# Altium PCB RevC.PcbDoc (part 2 of 2)
Units mm, origin at the board's own origin, x right, y up, seen from the top; angles counter-clockwise.
Board outline 80 x 88.52 mm, 2 copper layers (Top Layer, Bottom Layer); 116 components, 77 nets, 532 pads, 209 vias.
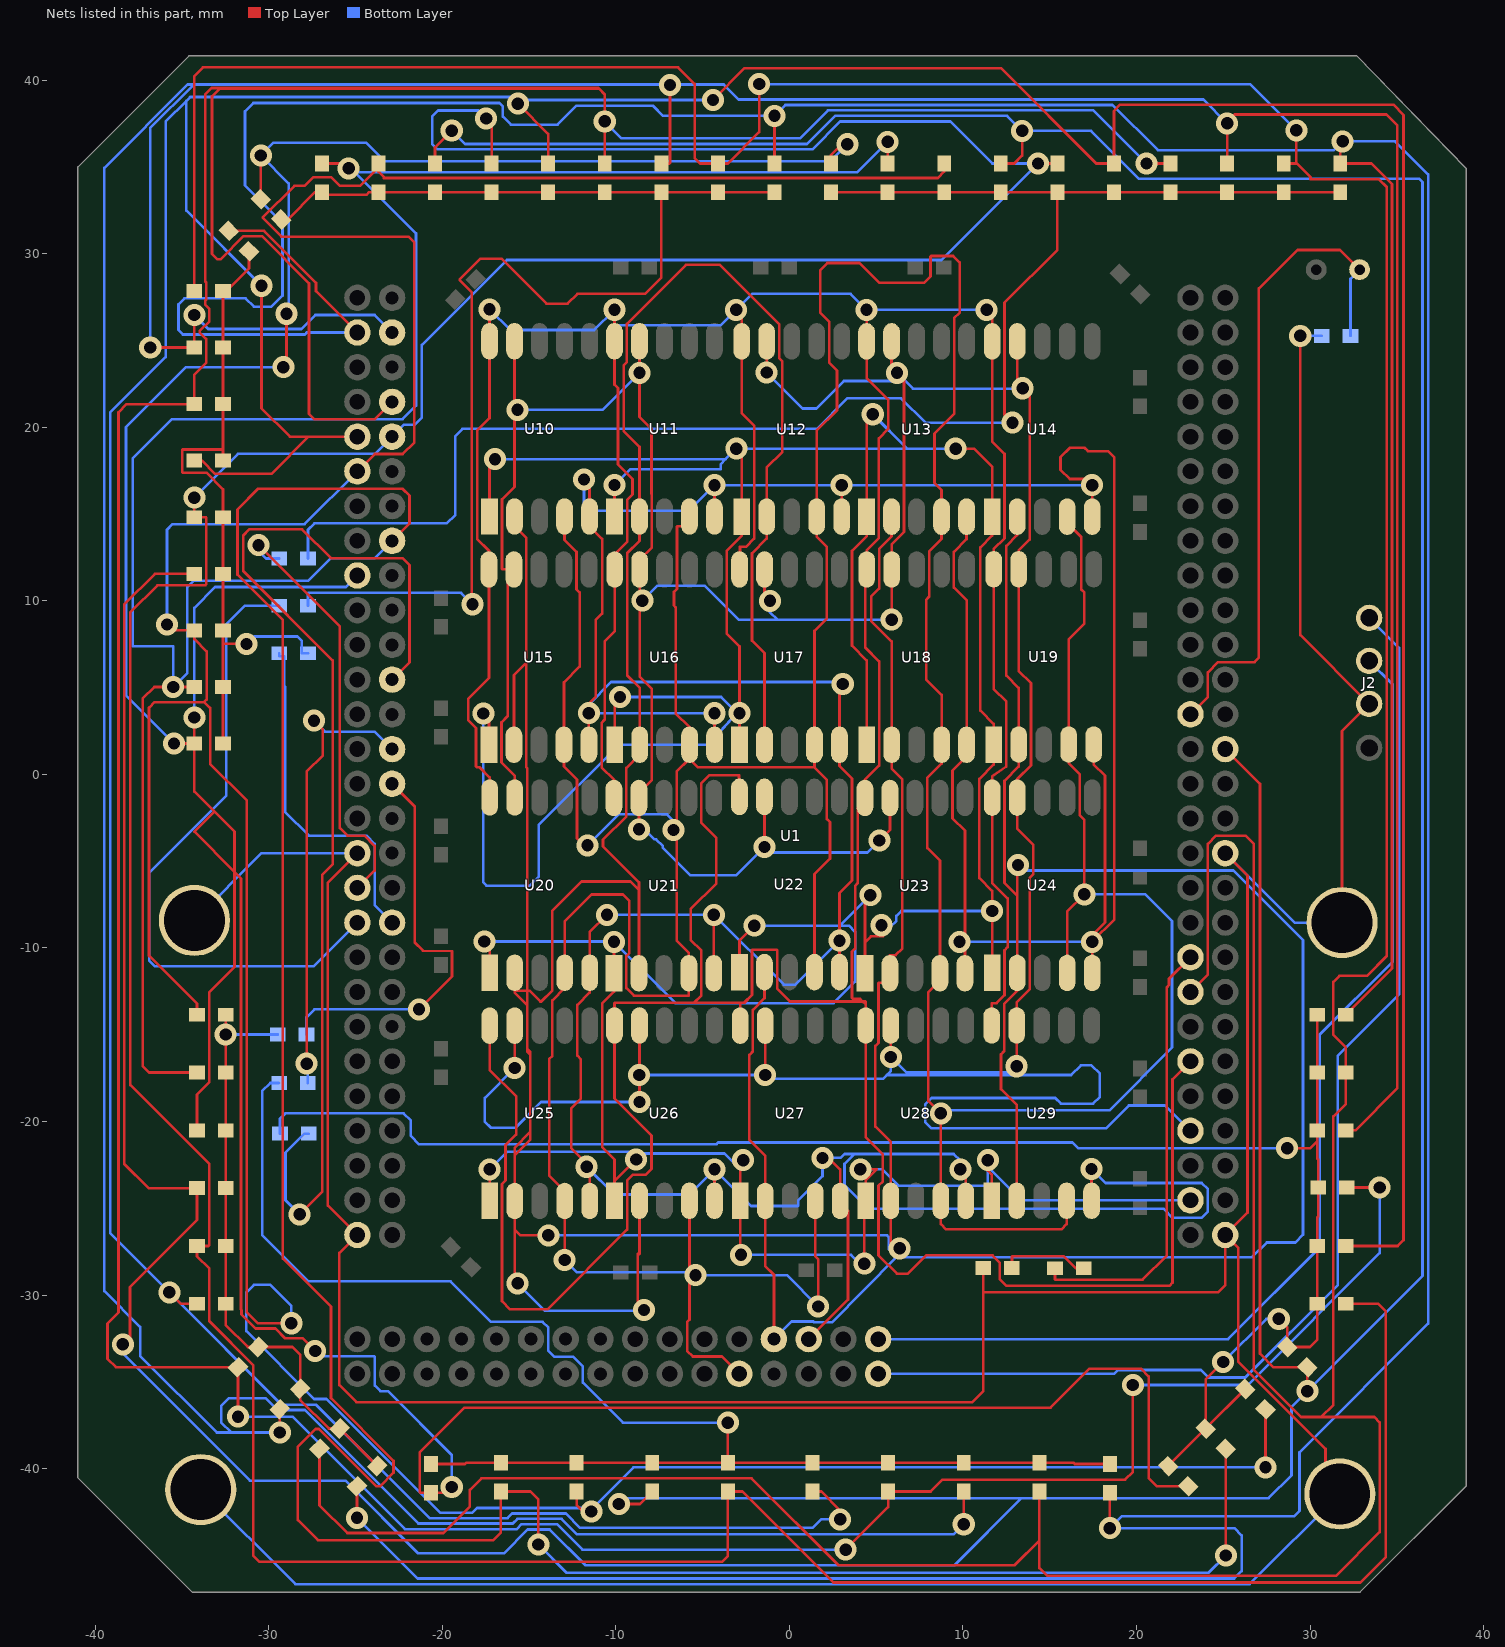
[diagram p2: the nets of this part, all layers, seen from the top]

## Via types
v1: diameter 1.27, hole 0.711, Top Layer to Bottom Layer, 209 vias

## Nets (pads, with @x,y where several pads share a name; then routed paths per layer and width w, separated by ;. In a path a pad name is that pad's centre, name@x,y a point inside that pad or via, vN(x,y) a via of type N, cw(c..) or ccw(c..) an arc to the next point about the centre after c; other vN are vias at no path point) (continued)
C_c/IO_VB7N2_197: U1.197 U10.4 U11.4 U12.4 U13.4 U14.4 U15.4 U16.4 U17.4 U18.4 U19.4 U20.4 U21.4 U22.4 U23.4 U24.4 U25.4 U26.4 U27.4 U28.4 U29.4 | length 307.5
  Top Layer w0.152: U10.4@-12.959,14.86 -12.959,13.518 -12.268,12.827 -12.268,10.668 -12.09,10.49 -12.09,6.211 -12.993,5.309 U15.4@-12.993,1.711 -12.993,0.457 -12.242,-0.294 -12.242,-3.683 -11.835,-4.089 v1(-11.633,-4.089) ; v1(-12.952,-27.98) U25.4@-12.952,-24.578 -12.952,-24.003 -13.843,-23.112 -13.843,-16.408 -13.665,-16.231 -13.665,-13.017 -12.952,-12.303 U20.4@-12.952,-11.43 -12.952,-8.482 -11.392,-6.921 -9.588,-6.921 -9.22,-7.29 -9.22,-10.287 -9.398,-10.465 -9.398,-12.306 -8.954,-12.751 -5.816,-12.751 -5.791,-12.725 U21.4@-5.791,-11.456 -5.791,-10.287 -6.502,-9.576 v1@-6.502,-3.023 ; v1(-6.68,-3.2) v1@-6.502,-3.023 ; U26.4@-5.759,-24.564 v1@-5.759,-28.506 ; U11.4@-5.759,14.86 -5.759,14.3 -6.452,14.3 -6.477,14.275 -6.477,10.693 -6.655,10.516 -6.655,9.728 -6.553,9.627 -6.553,3.517 -5.754,2.718 U16.4@-5.754,1.711 U16.4@-5.754,0.903 ; v1(-5.41,-28.854) v1@-5.759,-28.506 ; U1.197@-2.892,-34.538 -3.892,-33.538 -5.565,-33.538 -5.893,-33.21 -5.893,-31.547 -5.759,-31.413 v1@-5.759,-28.506 ; U22.4@1.441,-11.392 1.441,-5.747 2.337,-4.851 2.337,-2.743 2.159,-2.565 2.159,-0.318 1.444,0.398 1.444,0.406 ; U27.4@1.483,-24.578 1.483,-27.762 1.651,-27.93 v1(1.651,-30.658) ; U29.4@15.969,-24.564 15.969,-25.908 15.664,-26.213 9.029,-26.213 8.724,-25.908 U28.4@8.724,-24.57 v1(8.724,-19.533) 8.013,-18.821 8.001,-18.821 8.001,-12.548 8.673,-11.876 U23.4@8.673,-11.456 8.673,-4.965 7.95,-4.242 7.95,-0.191 8.767,0.626 U18.4@8.767,1.711 8.767,4.572 7.874,5.465 7.874,10.058 8.052,10.236 8.052,12.85 8.765,13.564 U13.4@8.765,14.852 8.765,16.381 8.357,16.789 8.357,19.638 9.495,20.777 9.495,26.284 9.804,26.594 9.804,29.502 9.436,29.87 8.179,29.87 8.128,29.82 8.128,28.702 7.747,28.321 5.182,28.321 4.039,29.464 2.184,29.464 1.778,29.058 1.778,26.594 2.286,26.086 2.286,23.724 2.743,23.266 2.743,20.98 1.569,19.806 U12.4@1.569,14.852 1.569,13.696 2.159,13.106 2.159,8.992 1.444,8.277 U17.4@1.444,1.711 1.444,0.406 ; U24.4@16.004,-11.437 16.004,-7.897 v1(16.993,-6.909) 16.993,-2.616 16.734,-2.357 16.734,0 16.09,0.644 U19.4@16.09,1.719 16.09,7.784 16.993,8.687 16.993,10.49 16.815,10.668 16.815,13.691 16.004,14.501 U14.4@16.004,14.852 ; v1@-6.502,-3.023 -6.502,0.154 U16.4@-5.754,0.903 ; U16.4@-5.754,0.903 -5.258,0.406 1.444,0.406
  Bottom Layer w0.152: v1(-12.952,-27.98) -12.255,-28.677 -5.588,-28.677 v1(-5.41,-28.854) -0.152,-28.854 v1(1.651,-30.658) ; v1(-11.633,-4.089) -9.847,-2.303 -7.048,-2.303 -6.68,-2.671 v1(-6.68,-3.2) ; v1(8.724,-19.533) 8.902,-19.355 18.43,-19.355 22.047,-15.738 22.047,-8.445 20.511,-6.909 v1(16.993,-6.909)
C_d/IO_VB7N2_196: U1.196 U10.2 U11.2 U12.2 U13.2 U14.2 U15.2 U16.2 U17.2 U18.2 U19.2 U20.2 U21.2 U22.2 U23.2 U24.2 U25.2 U26.2 U27.2 U28.2 U29.2 | length 360.5
  Top Layer w0.152: U15.2@-15.873,1.711 -15.873,5.729 -15.163,6.439 ; U10.2@-15.839,14.86 -15.839,14.3 -15.163,13.624 -15.163,6.439 ; U20.2@-15.832,-11.43 U20.2@-15.832,-12.471 ; v1(-15.659,-29.324) -15.832,-29.151 -15.832,-26.226 ; v1(-13.894,-26.561) -15.497,-26.561 -15.832,-26.226 ; U21.2@-8.671,-11.456 -8.671,-6.655 ; U26.2@-8.639,-24.564 -8.639,-27.638 -8.738,-27.638 -8.738,-30.505 v1(-8.382,-30.861) ; U22.2@-1.439,-11.392 -1.439,-12.897 -2.108,-13.566 -2.108,-15.951 -2.311,-16.154 -2.311,-21.057 -1.397,-21.971 U27.2@-1.397,-24.578 -1.397,-28.324 -0.892,-28.829 U1.196@-0.892,-32.538 ; U17.2@-1.436,1.711 -1.436,6.985 -2.159,7.708 -2.159,12.74 -1.311,13.588 U12.2@-1.311,14.852 -1.311,17.678 -0.406,18.583 -0.406,23.8 -0.584,23.978 -0.584,25.933 -4.013,29.362 -5.969,29.362 -9.369,25.963 -9.369,23.749 -9.55,23.567 -9.55,19.787 -8.639,18.875 U11.2@-8.639,14.86 -8.639,13.462 -9.344,12.757 -9.344,5.712 -8.634,5.002 U16.2@-8.634,1.711 -8.634,1.143 -9.398,0.379 -9.398,-2.413 -10.744,-3.759 -10.744,-4.15 -8.671,-6.223 -8.671,-6.655 ; v1@5.844,-27.178 U28.2@5.844,-24.57 5.844,-21.184 4.953,-20.293 4.953,-15.646 5.131,-15.469 5.131,-12.04 5.156,-12.014 5.793,-12.014 U23.2@5.793,-11.456 5.793,-10.414 6.122,-10.414 6.503,-10.033 6.503,-0.286 5.887,0.33 U18.2@5.887,1.711 5.887,7.656 4.704,8.839 4.704,10.241 5.167,10.704 5.167,12.997 5.885,13.715 U13.2@5.885,14.852 ; U29.2@13.089,-24.564 13.089,-19.033 12.192,-18.136 12.192,-16.129 12.37,-15.951 12.37,-13.226 13.124,-12.471 U24.2@13.124,-11.437 13.124,-6.988 ; U14.2@13.124,14.852 13.124,13.792 12.497,13.165 12.497,5.692 13.21,4.978 U19.2@13.21,1.719 13.21,0.445 12.395,-0.37 12.395,-6.259 13.124,-6.988 ; v1(13.17,-5.22) 13.124,-5.266 13.124,-6.988 ; -15.832,-26.226 U25.2@-15.832,-24.578 -15.832,-21.953 ; -15.832,-21.953 -14.935,-21.057 -14.935,-20.617 ; -15.832,-21.953 -15.832,-21.514 -14.935,-20.617 ; U20.2@-15.832,-12.471 -15.113,-12.471 ; U20.2@-15.832,-12.471 -15.832,-12.573 -15.113,-13.292 ; -15.163,6.439 -15.163,0.405 -15.113,0.356 -15.113,-12.471 ; -15.113,-15.799 -14.935,-15.977 -14.935,-16.129 ; -15.113,-15.799 -15.113,-13.292 ; -15.113,-15.799 -15.113,-15.951 -14.935,-16.129 ; -15.113,-13.292 -15.113,-12.471 ; -15.113,-12.471 -14.961,-12.471 -14.351,-13.081 -14.3,-13.081 -13.665,-12.446 -13.665,-7.849 -11.983,-6.167 -9.159,-6.167 -8.671,-6.655 ; -14.935,-20.617 -14.935,-16.129
  Bottom Layer w0.152: v1(-15.659,-29.324) -14.072,-30.912 -8.433,-30.912 v1(-8.382,-30.861) ; v1(-13.894,-26.561) 5.633,-26.561 5.715,-26.643 5.715,-27.356 v1@6.172,-27.813 ; U1.196@-0.892,-32.538 0.125,-31.521 1.372,-31.521 1.422,-31.572 2.451,-31.572 v1@6.172,-27.813 ; v1(13.17,-5.22) 13.487,-5.537 25.578,-5.537 29.591,-9.55 29.591,-26.524 29.146,-26.968 27.506,-26.968 26.661,-27.813 v1@6.172,-27.813
  other v1: 6.35,-27.305
C_DP/IO_VB7N2_194: U1.194 U10.5 U11.5 U12.5 U13.5 U14.5 U15.5 U16.5 U17.5 U18.5 U19.5 U20.5 U21.5 U22.5 U23.5 U24.5 U25.5 U26.5 U27.5 U28.5 U29.5 | length 294.2
  Top Layer w0.152: v1(-11.836,16.993) -11.519,16.675 U10.5@-11.519,14.86 -11.519,14.3 -10.795,13.576 -10.795,9.271 -11.151,8.915 -11.151,4.496 -11.553,4.093 v1@-11.553,3.527 ; v1(-11.557,3.531) v1@-11.553,3.527 ; U15.5@-11.553,1.711 v1@-11.553,3.527 ; v1@-11.549,3.523 v1@-11.553,3.527 ; U25.5@-11.512,-24.578 -11.512,-22.6 -12.573,-21.539 -12.573,-19.237 -12.014,-18.679 -12.014,-16.413 -12.222,-16.205 -12.222,-13.283 -11.512,-12.573 U20.5@-11.512,-11.43 -11.512,-9.086 v1(-10.516,-8.09) ; U21.5@-4.351,-11.456 v1(-4.351,-8.09) ; U26.5@-4.319,-24.564 v1(-4.319,-22.752) ; U11.5@-4.319,14.86 v1(-4.319,16.662) v1@-4.319,16.672 ; U16.5@-4.314,1.711 v1(-4.314,3.523) ; U1.194@1.108,-32.538 3.378,-30.268 3.378,-25.146 2.923,-25.146 U27.5@2.923,-24.578 2.923,-22.766 2.255,-22.098 v1(1.905,-22.098) ; U22.5@2.881,-11.392 v1(2.881,-9.58) 2.881,-6.831 3.607,-6.105 3.607,-0.24 2.884,0.483 U17.5@2.884,1.711 2.884,5.018 v1(3.073,5.207) ; U12.5@3.009,14.852 v1(3.009,16.662) ; v1@9.754,-22.758 v1@10.164,-23.169 ; v1(9.796,-9.644) v1@10.113,-9.962 ; v1(9.847,-22.758) 10.138,-22.758 10.164,-22.784 v1@10.164,-23.169 ; U23.5@10.113,-11.456 v1@10.113,-9.962 ; U28.5@10.164,-24.57 v1@10.164,-23.169 ; U13.5@10.205,14.852 10.205,13.555 9.477,12.827 9.477,10.767 10.207,10.037 U18.5@10.207,1.711 10.207,1.038 9.398,0.229 9.398,-2.527 10.113,-3.242 v1@10.113,-9.962 ; U29.5@17.409,-24.564 v1(17.409,-22.733) ; U24.5@17.444,-11.437 v1(17.444,-9.644) v1@17.444,-9.627 ; U14.5@17.444,14.852 v1(17.444,16.662) 17.444,16.681 17.107,17.018 16.153,17.018 15.621,17.55 15.621,18.288 16.154,18.821 17.011,18.821 17.205,18.628 18.351,18.628 18.72,18.259 18.72,-8.351 v1@17.444,-9.627 ; U19.5@17.53,1.719 17.53,0.58 18.186,-0.076 18.186,-8.534 17.444,-9.277 v1@17.444,-9.627
  Bottom Layer w0.152: v1(-11.836,16.993) -11.836,15.545 -11.493,15.202 -5.789,15.202 -4.324,16.667 v1@-4.319,16.672 ; v1(-11.684,-22.606) -10.084,-24.206 -5.766,-24.206 -4.319,-22.759 v1(-4.319,-22.752) -2.204,-24.867 0.479,-24.867 0.505,-24.841 0.505,-24.549 1.905,-23.149 v1(1.905,-22.098) 2.956,-22.098 3.185,-21.869 3.746,-21.869 ; v1(-11.557,3.531) -11.557,4.04 -10.274,5.323 2.957,5.323 v1(3.073,5.207) ; v1@-11.549,3.523 v1(-4.314,3.523) ; v1(-10.516,-8.09) v1(-4.351,-8.09) -0.325,-12.116 0.345,-12.116 v1(2.881,-9.58) ; v1(-4.319,16.662) v1(3.009,16.662) v1(17.444,16.662) ; v1(9.796,-9.644) v1(17.444,-9.644) ; v1(9.847,-22.758) 9.847,-22.254 9.461,-21.869 3.746,-21.869 ; v1(17.409,-22.733) 18.222,-23.546 23.749,-23.546 24.105,-23.901 24.105,-25.191 23.749,-25.546 22.073,-25.546 21.545,-25.019 4.534,-25.019 3.175,-23.66 3.175,-22.441 3.746,-21.869
C_e/IO_VB7N0_183: U1.183 U10.1 U11.1 U12.1 U13.1 U14.1 U15.1 U16.1 U17.1 U18.1 U19.1 U20.1 U21.1 U22.1 U23.1 U24.1 U25.1 U26.1 U27.1 U28.1 U29.1 | length 285
  Top Layer w0.152: v1(-17.64,3.505) -17.313,3.178 U15.1@-17.313,1.711 ; v1(-17.577,-9.627) -17.272,-9.931 U20.1@-17.272,-11.43 ; U10.1@-17.279,14.86 -17.279,17.849 v1(-16.967,18.161) ; U25.1@-17.272,-24.578 v1(-17.272,-22.758) ; v1(-10.111,-9.644) U21.1@-10.111,-11.456 -10.111,-12.522 -10.795,-13.206 -10.795,-21.471 -10.079,-22.187 -10.079,-23.431 ; U26.1@-10.079,-24.564 -10.079,-23.431 ; U11.1@-10.079,14.86 v1(-10.079,16.672) ; U16.1@-10.074,1.711 -10.074,4.15 v1(-9.766,4.458) ; v1(-8.834,-22.187) -10.079,-23.431 ; v1(-3.061,18.771) -2.751,18.461 U12.1@-2.751,14.852 -2.751,13.741 -3.604,12.889 -3.604,8.103 -2.876,7.375 v1(-2.876,3.531) U17.1@-2.876,1.711 ; U22.1@-2.879,-11.392 -2.879,-9.572 v1(-2.019,-8.712) ; v1@-2.837,-27.389 U27.1@-2.837,-24.578 -2.837,-22.766 v1@-2.833,-22.762 ; v1(4.087,-22.758) 5.014,-22.758 4.404,-23.368 U28.1@4.404,-24.57 4.318,-24.656 v1(4.318,-28.194) ; U23.1@4.353,-11.456 4.353,-9.673 ; U18.1@4.447,1.711 4.447,6.577 3.607,7.417 3.607,12.878 4.445,13.716 U13.1@4.445,14.852 4.445,20.396 v1(4.801,20.752) ; v1(4.661,-6.96) 4.353,-7.267 4.353,-9.673 ; v1(5.306,-8.692) 5.44,-8.826 5.44,-9.264 5.377,-9.327 4.699,-9.327 4.353,-9.673 ; v1(9.576,18.771) 10.643,18.771 11.684,17.729 U14.1@11.684,14.852 11.684,13.767 10.998,13.081 10.998,3.683 11.77,2.911 U19.1@11.77,1.719 11.77,0.559 10.947,-0.264 10.947,-5.976 11.684,-6.712 v1(11.684,-7.87) U24.1@11.684,-11.437 ; v1(11.43,-22.225) 11.43,-22.832 11.649,-23.05 U29.1@11.649,-24.564
  Bottom Layer w0.152: v1(-17.64,3.505) -17.64,-6.223 -17.456,-6.407 -14.954,-6.407 -14.453,-5.905 -14.453,-2.921 -9.83,1.702 -4.705,1.702 -3.01,3.531 -3.937,4.458 v1(-9.766,4.458) ; v1(-17.577,-9.627) -10.128,-9.627 v1(-10.111,-9.644) -6.572,-13.183 2.54,-13.183 3.785,-11.938 3.785,-9.068 3.429,-8.712 2.908,-8.712 ; v1(-17.272,-22.758) -16.254,-21.741 -9.28,-21.741 v1(-8.834,-22.187) -8.834,-21.844 -3.751,-21.844 v1@-2.833,-22.762 ; v1(-16.967,18.161) -3.67,18.161 ; v1(-10.079,16.672) -9.174,17.577 -3.962,17.577 -3.962,17.869 -3.67,18.161 ; v1(-2.794,-27.686) 3.556,-27.686 4.064,-28.194 v1(4.318,-28.194) ; v1(-2.019,-8.712) 2.908,-8.712 ; v1(4.087,-22.758) 5.357,-22.758 6.297,-23.698 11.281,-23.698 11.43,-23.549 v1(11.43,-22.225) ; v1(4.661,-6.96) 2.908,-8.712 ; v1(4.801,20.752) 6.782,18.771 ; v1@5.829,-8.772 6.155,-8.446 6.155,-8.159 6.444,-7.87 v1(11.684,-7.87) ; v1(9.576,18.771) 6.782,18.771 ; v1@11.451,-22.614 13.375,-24.538 U1.183@23.108,-24.538 ; -3.67,18.161 v1(-3.061,18.771) 6.782,18.771
  other v1: -2.667,-22.225
C_f/IO_VB7N0_176: U1.176 U10.9 U11.9 U12.9 U13.9 U14.9 U15.9 U16.9 U17.9 U18.9 U19.9 U20.9 U21.9 U22.9 U23.9 U24.9 U25.9 U26.9 U27.9 U28.9 U29.9 | length 276.5
  Top Layer w0.152: U15.9@-15.873,11.811 U15.9@-16.231,11.811 ; U10.9@-15.839,24.96 v1@-15.839,21.173 ; v1(-15.832,-16.916) U25.9@-15.832,-14.478 ; U20.9@-15.832,-1.33 -15.832,-0.068 -16.586,0.686 -16.586,2.997 -16.231,3.353 U15.9@-16.231,11.811 ; v1(-15.672,21.006) v1@-15.839,21.173 ; v1(-8.671,-3.168) U21.9@-8.671,-1.356 -8.671,-1.077 -7.924,-0.33 -7.924,4.919 -8.634,5.629 v1@-8.634,10.171 ; v1(-8.661,-17.323) v1@-8.639,-17.3 ; v1(-8.639,-18.872) v1@-8.639,-17.3 ; U26.9@-8.639,-14.464 v1@-8.639,-17.3 ; U11.9@-8.639,24.96 v1(-8.639,23.139) -8.639,20.602 -7.95,19.914 -7.95,16.154 -7.925,16.129 -7.925,13.079 -8.634,12.37 U16.9@-8.634,11.811 v1@-8.634,10.171 ; v1(-8.471,10.008) v1@-8.634,10.171 ; v1(-1.439,-4.182) U22.9@-1.439,-1.292 ; U17.9@-1.436,11.811 -1.436,10.316 v1(-1.119,9.999) ; v1(-1.397,-17.323) U27.9@-1.397,-14.478 ; v1(-1.311,23.155) U12.9@-1.311,24.952 ; v1(5.182,-3.81) 5.793,-3.199 U23.9@5.793,-1.356 ; v1(5.844,-16.282) U28.9@5.844,-14.47 ; U13.9@5.885,24.952 5.885,23.698 ; v1(5.887,8.915) U18.9@5.887,11.811 5.887,13.259 6.604,13.976 6.604,22.979 5.885,23.698 ; v1(6.202,23.14) 5.885,23.457 5.885,23.698 ; v1(13.089,-16.815) U29.9@13.089,-14.464 13.089,-13.139 13.843,-12.385 13.843,-5.96 14.046,-5.756 14.046,-4.048 13.124,-3.126 U24.9@13.124,-1.337 13.124,-0.279 13.92,0.517 13.92,5.257 13.21,5.967 U19.9@13.21,11.819 13.21,12.894 13.843,13.527 13.843,21.849 v1(13.441,22.25) 13.124,22.568 U14.9@13.124,24.952 ; U15.9@-16.231,11.811 -16.535,11.811 -16.561,11.836 -16.561,15.85 -15.839,16.571 v1@-15.839,21.173
  Bottom Layer w0.152: v1(-15.832,-16.916) -17.551,-18.636 -17.551,-20.017 -17.209,-20.36 -15.797,-20.36 -14.31,-18.872 v1(-8.639,-18.872) ; v1(-15.672,21.006) -10.773,21.006 v1(-8.639,23.139) ; v1(-8.671,-3.168) -8.354,-3.168 -7.777,-3.745 -7.683,-3.745 -7.293,-4.135 -7.293,-4.229 -5.703,-5.818 -3.075,-5.818 v1(-1.439,-4.182) -1.439,-4.496 4.496,-4.496 v1(5.182,-3.81) ; v1(-8.661,-17.323) v1(-1.397,-17.323) -1.194,-17.526 5.412,-17.526 5.615,-17.323 ; v1(-8.471,10.008) -7.607,10.871 -4.884,10.871 -2.928,8.915 -0.699,8.915 ; v1(-1.311,23.155) 0.762,21.082 1.551,21.082 3.139,22.669 6.202,22.669 v1(6.202,23.14) 7.117,22.225 13.416,22.225 v1(13.441,22.25) ; v1(-1.119,9.999) -1.119,9.335 -0.699,8.915 ; v1(5.887,8.915) -0.699,8.915 ; v1(13.089,-16.815) 12.733,-17.17 6.732,-17.17 v1(5.844,-16.282) 5.844,-17.094 5.615,-17.323 ; U1.176@23.108,-20.538 21.643,-19.074 19.56,-19.074 18.236,-20.398 8.191,-20.398 7.823,-20.03 7.823,-19.012 8.191,-18.644 15.316,-18.644 15.646,-18.974 17.488,-18.974 17.882,-18.58 17.882,-17.247 17.399,-16.764 16.789,-16.764 16.231,-17.323 5.615,-17.323
C_g/IO_VB6N1_171: U1.171 U10.10 U11.10 U12.10 U13.10 U14.10 U15.10 U16.10 U17.10 U18.10 U19.10 U20.10 U21.10 U22.10 U23.10 U24.10 U25.10 U26.10 U27.10 U28.10 U29.10 | length 325.3
  Top Layer w0.152: v1(-17.279,26.797) U10.10@-17.279,24.96 -17.279,20.523 -17.989,19.813 -17.989,13.564 -17.313,12.887 U15.10@-17.313,11.811 -17.313,5.561 -18.506,4.369 -18.506,3.113 -18.059,2.667 -18.059,0.457 -18.009,0.406 -17.843,0.406 -17.272,-0.165 U20.10@-17.272,-1.33 ; U25.10@-17.272,-14.478 -17.272,-17.018 -15.748,-18.542 -15.748,-20.752 -16.358,-21.361 -16.358,-23.393 -16.561,-23.597 -16.561,-30.353 -16.089,-30.825 -13.948,-30.825 -9.349,-26.226 -9.349,-23.393 -9.019,-23.063 -8.274,-23.063 -7.95,-22.739 -7.95,-20.803 -10.079,-18.674 U26.10@-10.079,-14.464 -10.079,-13.183 ; U21.10@-10.111,-1.356 -10.111,-0.303 -10.82,0.406 -10.82,2.972 -10.643,3.15 -10.643,7.671 -10.074,8.239 U16.10@-10.074,11.811 -10.074,12.673 -9.349,13.398 -9.349,15.822 -9.042,16.129 -9.042,17.018 -9.881,17.856 -9.881,22.255 -10.079,22.454 U11.10@-10.079,24.96 v1(-10.079,26.772) ; v1(-3.069,26.764) -2.751,26.446 U12.10@-2.751,24.952 -2.751,20.81 -2.032,20.091 -2.032,13.589 -2.508,13.113 -2.845,13.113 U17.10@-2.876,11.811 ; U22.10@-2.879,-1.292 -2.904,-0.051 -4.623,-0.051 -5.08,-0.508 -5.08,-2.794 -4.215,-3.659 -4.215,-6.272 -5.69,-7.747 -5.69,-9.55 -5.08,-10.16 -5.08,-12.751 -5.486,-13.157 ; U27.10@-2.837,-14.478 -2.837,-13.183 -2.862,-13.157 ; v1@4.445,26.772 v1(4.445,26.764) U13.10@4.445,24.952 4.445,22.847 5.69,21.603 5.69,19.901 5.155,19.367 5.155,13.614 4.447,12.906 U18.10@4.447,11.811 4.447,11.252 4.369,11.174 4.369,7.315 5.167,6.517 5.167,0.509 4.353,-0.305 U23.10@4.353,-1.356 4.353,-1.93 3.962,-1.93 3.937,-1.956 3.937,-6.271 3.785,-6.423 3.785,-10.033 3.607,-10.211 3.607,-12.878 3.658,-12.929 4.064,-12.929 4.216,-13.081 ; v1(11.367,26.772) 11.684,26.454 U14.10@11.684,24.952 11.684,19.177 12.395,18.466 12.395,13.605 11.77,12.979 U19.10@11.77,11.819 11.77,4.928 12.497,4.201 12.497,0.457 11.684,-0.102 U24.10@11.684,-1.337 11.684,-6.25 12.573,-7.139 12.573,-9.957 12.395,-10.135 12.395,-12.718 11.931,-13.183 11.674,-13.183 11.649,-13.208 U29.10@11.649,-14.464 ; U1.171@23.108,-16.538 22.073,-17.574 22.073,-29.286 21.895,-29.464 12.497,-29.464 12.116,-29.083 12.116,-28.13 11.697,-27.711 7.874,-27.711 6.82,-28.765 6.185,-28.765 5.131,-27.711 5.131,-23.698 5.385,-23.444 5.385,-21.895 4.404,-20.914 U28.10@4.404,-14.47 4.404,-13.269 ; -10.079,-13.183 -10.054,-13.157 -5.486,-13.157 ; -10.079,-13.183 -5.486,-13.157 ; -5.486,-13.157 -2.862,-13.157 ; -2.862,-13.157 -2.603,-13.157 -2.159,-12.713 -2.159,-10.135 -2.134,-10.109 -0.737,-10.109 -0.711,-10.135 -0.711,-12.344 0.025,-13.081 4.216,-13.081 ; 4.216,-13.081 4.379,-13.081 4.404,-13.106 4.404,-13.269 ; 4.216,-13.081 4.404,-13.269
  Bottom Layer w0.152: v1(-17.279,26.797) -16.085,25.603 -11.248,25.603 v1(-10.079,26.772) -10.079,25.883 -3.95,25.883 v1(-3.069,26.764) -2.147,27.686 3.531,27.686 v1@4.445,26.772 ; v1(4.445,26.764) 4.453,26.772 v1(11.367,26.772)
D0: D10.1 D11.1 D12.1 D13.1 D14.1 D15.1 D16.1 D17.1 D18.1 D19.1 R30.2 | length 39.8
  Top Layer w0.152: D10.1@-32.639,1.778 D11.1@-32.639,5.038 -32.639,7.544 ; D15.1@-32.639,18.078 -32.639,18.694 ; D18.1@-32.639,27.858 D18.1@-32.639,27.664 ; v1(-31.28,7.518) -32.614,7.518 -32.639,7.544 ; D19.1@-31.139,30.149 -31.139,29.164 D18.1@-32.639,27.664 ; -32.639,7.544 D12.1@-32.639,8.298 D13.1@-32.639,11.558 D14.1@-32.639,14.818 -32.639,16.425 -33.596,17.383 -34.95,17.383 -34.976,17.408 -34.976,18.694 -34.95,18.72 -32.664,18.72 -32.639,18.694 ; -32.639,18.694 D16.1@-32.639,21.338 D17.1@-32.639,24.598 D18.1@-32.639,27.664
  Bottom Layer w0.152: v1(-31.28,7.518) -30.848,7.95 -28.345,7.95 -28.092,7.698 -28.092,6.981 R30.2@-27.743,6.981
D0/IO_VB2N0_37: R30.1 U1.37 | length 20.3
  Bottom Layer w0.152: R30.1@-29.394,6.981 -29.394,6.807 -29.1,6.807 -29.1,5.097 -29.062,5.059 -29.062,-2.154 -27.686,-3.531 -24.37,-3.531 -23.9,-4 -23.9,-7.531 U1.37@-22.892,-8.538
D1: D20.1 D21.1 D22.1 D23.1 D24.1 D25.1 D26.1 D27.1 D28.1 D29.1 R31.2 | length 77.5
  Top Layer w0.152: D20.1@-29.288,31.976 -28.905,31.976 -27.332,33.549 D21.1@-26.941,33.549 -26.941,33.393 -24.368,33.393 -24.212,33.549 D22.1@-23.681,33.549 D23.1@-20.421,33.549 D24.1@-17.161,33.549 D25.1@-13.901,33.549 D26.1@-10.641,33.549 D27.1@-7.381,33.549 ; v1(-18.263,9.804) -18.313,9.855 -18.313,27.788 -18.999,28.473 -18.999,28.524 -17.805,29.718 -16.599,29.718 -14.008,27.127 -12.776,27.127 -12.217,27.686 -8.322,27.686 -7.381,28.627 D27.1@-7.381,33.549 ; D29.1@-0.861,33.549 D28.1@-4.121,33.549 D27.1@-7.381,33.549
  Bottom Layer w0.152: R31.2@-27.739,9.718 -27.739,10.439 -27.714,10.465 -18.923,10.465 v1(-18.263,9.804)
D1/IO_VB2N0_38: R31.1 U1.38 | length 37.9
  Bottom Layer w0.152: R31.1@-29.39,9.718 -31.379,9.718 -32.452,8.645 -32.452,-1.235 -36.881,-5.664 -36.881,-10.744 -36.576,-11.049 -27.403,-11.049 U1.38@-24.892,-8.538
D1_OUT: D1.2 R1.1 | length 5.1
  Top Layer w0.152: R1.1@12.82,-28.448 12.82,-27.788 12.846,-27.762 15.799,-27.762 16.488,-28.452 D1.2@16.954,-28.452
D2: D30.1 D31.1 D32.1 D33.1 D34.1 D35.1 D36.1 D37.1 D38.1 D39.1 R32.2 | length 92.7
  Top Layer w0.152: D30.1@2.399,33.549 D31.1@5.659,33.549 D32.1@8.919,33.549 D33.1@12.179,33.549 D34.1@15.439,33.549 ; v1(12.852,20.269) 12.395,20.726 12.395,27.182 15.439,30.226 D34.1@15.439,33.549 ; D39.1@31.739,33.549 D38.1@28.479,33.549 D37.1@25.219,33.549 D36.1@21.959,33.549 D35.1@18.699,33.549 D34.1@15.439,33.549
  Bottom Layer w0.152: R32.2@-27.743,12.442 -27.743,14.097 -27.378,14.462 -19.748,14.462 -19.253,14.957 -19.253,19.494 -18.834,19.914 1.575,19.914 3.327,21.666 6.439,21.666 7.836,20.269 v1(12.852,20.269)
D2/IO_VB2N0_41: R32.1 U1.41 | length 25.2
  Top Layer w0.152: v1(-30.594,13.208) -25.908,8.522 -25.908,-3.086 -25.463,-3.531 -24.497,-3.531 -23.9,-4.127 -23.9,-5.546 U1.41@-24.892,-6.538
  Bottom Layer w0.152: v1(-30.594,13.208) -30.594,12.89 -30.146,12.442 R32.1@-29.394,12.442
D5: D60.1 D61.1 D62.1 D63.1 D64.1 D65.1 D66.1 D67.1 D68.1 D69.1 R40.2 | length 34.5
  Top Layer w0.152: D62.1@-32.484,-13.849 v1(-32.484,-14.986) D61.1@-32.484,-17.179 D60.1@-32.484,-20.509 D63.1@-32.484,-23.839 D64.1@-32.484,-27.169 D65.1@-32.484,-30.499 -32.484,-31.716 -31.209,-32.991 D66.1@-30.607,-32.991 -28.639,-32.991 -28.194,-33.435 D67.1@-28.194,-35.404 -28.194,-36.039 -26.543,-37.69 D68.1@-25.908,-37.69 D69.1@-23.749,-39.849
  Bottom Layer w0.152: v1(-32.484,-14.986) R40.2@-29.477,-14.986
D5/IO_VB2N1_45: R40.1 U1.45 | length 23.8
  Top Layer w0.152: U1.45@-22.892,-0.538 -21.588,-1.842 -21.588,-9.692 -21.12,-10.16 -19.439,-10.185 -19.439,-11.633 v1(-21.344,-13.538)
  Bottom Layer w0.152: R40.1@-27.826,-14.986 -27.826,-13.996 -27.368,-13.538 v1(-21.344,-13.538)
D6: D70.1 D71.1 D72.1 D73.1 D74.1 D75.1 D76.1 D77.1 D78.1 D79.1 R41.2 | length 83.6
  Top Layer w0.152: D70.1@-20.651,-39.736 -18.694,-39.736 -18.628,-39.67 D71.1@-16.624,-39.67 D72.1@-12.264,-39.67 D73.1@-7.904,-39.67 D74.1@-3.544,-39.67 ; v1(-3.544,-37.351) D74.1@-3.544,-39.67 ; D79.1@18.465,-39.736 16.449,-39.736 16.383,-39.67 D78.1@14.404,-39.67 D77.1@10.044,-39.67 D76.1@5.684,-39.67 D75.1@1.324,-39.67 D74.1@-3.544,-39.67
  Bottom Layer w0.152: R41.2@-29.407,-17.784 -29.909,-17.784 -30.378,-18.253 -30.378,-26.532 -27.701,-29.21 -19.532,-29.21 -17.196,-31.546 -14.225,-31.546 -13.894,-31.877 -13.894,-33.21 -13.558,-33.546 -12.481,-33.546 -11.9,-34.127 -11.9,-35.039 -9.588,-37.351 v1(-3.544,-37.351)
D6/IO_VB2N2_49: R41.1 U1.49 | length 26.7
  Top Layer w0.152: v1(-27.813,-16.662) -27.813,0.173 -26.886,1.099 -26.886,2.591 v1(-27.394,3.099)
  Bottom Layer w0.152: v1(-27.813,-16.662) -27.756,-16.719 R41.1@-27.756,-17.784 ; v1(-27.394,3.099) -26.759,2.464 -23.894,2.464 U1.49@-22.892,1.462
D7: D80.1 D81.1 D82.1 D83.1 D84.1 D85.1 D86.1 D87.1 D88.1 D89.1 R42.2 | length 99.6
  Top Layer w0.152: D80.1@21.82,-39.854 D81.1@23.979,-37.695 ; v1(24.994,-33.858) 23.979,-34.873 D81.1@23.979,-37.695 D82.1@26.265,-35.409 ; v1(28.194,-31.369) 28.678,-31.853 D83.1@28.678,-32.996 29.985,-32.996 30.405,-32.575 D84.1@30.405,-30.499 D85.1@30.405,-27.169 30.405,-25.527 30.47,-25.462 D86.1@30.47,-23.801 30.47,-22.2 30.405,-22.134 30.405,-21.145 ; v1(28.677,-21.539) 30.011,-21.539 30.405,-21.145 ; D89.1@30.405,-13.849 D88.1@30.405,-17.179 D87.1@30.405,-20.509 30.405,-21.145
  Bottom Layer w0.152: R42.2@-29.35,-20.701 -29.35,-19.838 -29.045,-19.533 -22.238,-19.533 -21.819,-19.952 -21.819,-20.828 -21.336,-21.311 -4.216,-21.311 -4.115,-21.209 16.307,-21.209 16.637,-21.539 v1(28.677,-21.539) ; v1(24.994,-33.858) 27.483,-31.369 v1(28.194,-31.369)
D7/IO_VB2N3_55: R42.1 U1.55 | length 65.3
  Top Layer w0.152: v1(-28.219,-25.349) -26.924,-24.054 -26.924,-5.791 -26.314,-5.182 -26.314,6.563 -31.471,11.719 -31.471,13.779 -31.128,14.122 -28.08,14.122 -26.419,12.462 -22.288,12.462 -21.895,12.068 -21.895,6.459 U1.55@-22.892,5.462
  Bottom Layer w0.152: v1(-28.219,-25.349) -29.032,-24.536 -29.032,-21.793 -27.94,-20.701 R42.1@-27.699,-20.701
G0/IO_VB3N2_69: D10.2 D20.2 D30.2 D60.2 D70.2 D80.2 U1.69 | length 231
  Top Layer w0.152: v1(-35.458,1.778) D10.2@-34.29,1.778 ; v1(-34.29,3.277) D10.2@-34.29,1.778 ; D60.2@-34.135,-20.509 -34.135,-18.44 -33.426,-17.732 -33.426,-12.548 -31.979,-11.1 -31.979,-5.613 ; D20.2@-30.456,33.143 v1(-30.456,35.662) ; v1(-29.159,23.47) -28.981,23.647 v1(-28.981,26.543) ; v1(-27.33,-33.223) -28.067,-32.487 -28.342,-32.487 -28.344,-32.488 -29.06,-32.488 -29.619,-31.929 -30.764,-31.929 -31.574,-31.12 -31.574,-30.859 -31.598,-30.836 -31.598,-5.994 -31.979,-5.613 ; v1(-19.456,-41.059) -19.785,-41.387 D70.2@-20.651,-41.387 -21.26,-41.387 -21.311,-41.337 -21.311,-39.065 -18.731,-36.485 15.051,-36.485 17.297,-34.239 20.256,-34.239 20.701,-34.684 20.701,-40.538 21.184,-41.021 D80.2@22.987,-41.021 ; D30.2@2.399,35.2 2.399,35.686 3.023,36.309 v1(3.34,36.309) ; D10.2@-34.29,1.778 -34.29,-0.991 -33.134,-2.146 ; -33.134,-2.146 -34.29,-3.302 -31.979,-5.613 ; -33.134,-2.146 -31.979,-3.302 -31.979,-5.613
  Bottom Layer w0.152: v1(-35.458,1.778) -38.227,4.547 -38.227,20.015 -34.773,23.47 v1(-29.159,23.47) ; v1(-34.29,3.277) -34.29,9.601 -33.096,10.795 -25.559,10.795 U1.69@-24.892,11.462 ; v1(-28.981,26.543) -28.854,26.67 -28.854,34.06 v1(-30.456,35.662) -29.719,36.398 -24.395,36.398 -23.328,35.331 2.362,35.331 v1(3.34,36.309) ; v1(-27.33,-33.223) -27.023,-33.531 -23.927,-33.531 -23.884,-33.573 -23.884,-35.209 -23.558,-35.535 -23.139,-35.535 -19.456,-39.218 v1(-19.456,-41.059)
G1/IO_VB3N2_70: D11.2 D21.2 D31.2 D61.2 D71.2 D81.2 U1.70 | length 280.7
  Top Layer w0.152: D11.2@-34.29,5.038 v1(-35.509,5.038) -36.593,5.038 -37.262,4.369 -37.262,-16.811 -36.893,-17.179 D61.2@-34.135,-17.179 ; D21.2@-26.941,35.2 -25.54,35.2 v1@-25.034,34.694 ; U1.70@-22.892,13.462 -21.895,14.459 -21.895,16.066 -22.288,16.459 -30.607,16.459 -31.801,15.265 -31.801,11.506 -29.185,8.89 -29.185,-27.889 -26.416,-30.658 -26.416,-35.941 -22.809,-39.548 -22.809,-40.234 -23.597,-41.021 -23.8,-41.021 -27.102,-37.719 -27.305,-37.719 -28.321,-38.735 -28.321,-42.972 -27.173,-44.12 -17.056,-44.12 -16.624,-43.688 D71.2@-16.624,-41.321 -14.926,-41.321 -14.464,-41.783 v1(-14.464,-44.374) ; D31.2@5.659,35.2 v1(5.659,36.449) ; v1(25.146,-45.009) D81.2@25.146,-38.862
  Bottom Layer w0.152: U1.70@-22.892,13.462 -23.892,12.462 -26.416,12.462 -27.727,11.151 -34.341,11.151 -34.696,10.795 -34.696,5.851 v1(-35.509,5.038) -35.509,7.375 -37.846,7.375 -37.846,18.21 -35.587,20.469 -22.288,20.469 -21.514,21.244 -21.514,31.174 -25.034,34.694 3.904,34.694 v1(5.659,36.449) ; v1(-14.464,-44.374) -12.838,-45.999 24.155,-45.999 v1(25.146,-45.009)
  other v1: -25.4,34.925
G2/IO_VB3N1_78: D12.2 D22.2 D32.2 D62.2 D72.2 D82.2 U1.78 | length 242.5
  Top Layer w0.152: v1(-35.865,8.636) -35.527,8.298 D12.2@-34.29,8.298 -34.29,7.799 -33.579,7.088 -33.579,4.305 -33.718,4.166 ; D62.2@-34.135,-13.849 -34.135,-13.21 -36.881,-10.465 ; v1(-28.702,-31.623) -30.637,-31.623 -31.267,-30.993 -31.267,-1.511 -33.376,0.597 -33.376,3.823 -33.718,4.166 ; U1.78@-24.892,17.462 -23.892,18.462 -22.288,18.462 -21.615,19.135 -21.615,30.658 -21.946,30.988 -29.269,30.988 -30.356,32.076 -28.523,33.909 -27.94,33.909 -27.432,34.417 -26.416,34.417 -25.908,33.909 -24.757,33.909 -23.806,34.86 -23.681,34.734 ; D22.2@-23.681,35.2 -23.681,34.734 ; D72.2@-12.264,-41.321 -12.264,-42.1 -11.896,-42.469 v1(-11.417,-42.469) ; D32.2@8.919,35.2 8.919,34.734 8.551,34.366 -23.368,34.366 -23.368,34.422 -23.681,34.734 ; v1(27.432,-39.929) D82.2@27.432,-36.576 ; -36.881,-10.465 -36.881,3.861 ; -36.881,-10.465 -36.906,-10.439 -36.906,3.835 -36.881,3.861 ; -36.881,3.861 -36.576,4.166 -33.718,4.166
  Bottom Layer w0.152: v1(-35.865,8.636) -35.865,14.097 -35.547,14.414 -27.939,14.414 U1.78@-24.892,17.462 ; v1(-28.702,-31.623) -28.702,-30.62 -29.909,-29.413 -30.861,-29.413 -31.293,-29.845 -31.293,-32.08 -27.381,-35.992 -26.67,-35.992 -20.114,-42.548 -18.285,-42.548 -18.002,-42.266 -11.62,-42.266 v1(-11.417,-42.469) -11.417,-42.363 -8.983,-39.929 v1(27.432,-39.929)
G3/IO_VB5N0_143: D13.2 D23.2 D33.2 D63.2 D73.2 D83.2 U1.143 | length 335.7
  Top Layer w0.152: v1(-38.405,-32.842) -37.998,-32.436 -37.998,-29.54 -34.135,-25.677 D63.2@-34.135,-23.839 -36.923,-23.839 -38.329,-22.434 -38.329,9.791 -36.561,11.558 D13.2@-34.29,11.558 ; D23.2@-20.421,35.2 -20.421,36.127 v1(-19.456,37.091) ; v1(-9.83,-42.037) -8.62,-42.037 D73.2@-7.904,-41.321 ; D33.2@12.179,35.2 12.954,35.2 13.411,35.657 v1(13.411,37.084) ; U1.143@25.108,1.462 27.115,-0.546 27.115,-33.377 27.902,-34.163 D83.2@29.845,-34.163 v1(29.845,-35.535)
  Bottom Layer w0.152: v1(-38.405,-32.842) -38.405,-33.376 -31.09,-40.691 -25.578,-40.691 -21.387,-44.882 -16.459,-44.882 -15.086,-43.509 -13.819,-43.509 -11.76,-45.568 9.5,-45.568 13.365,-41.702 ; v1(-19.456,37.091) -18.691,36.326 1.016,36.326 2.637,37.948 12.548,37.948 v1(13.411,37.084) 17.374,37.084 20.142,34.315 36.297,34.315 36.474,34.138 36.474,-28.905 v1(29.845,-35.535) 28.931,-36.449 28.931,-40.386 27.615,-41.702 13.365,-41.702 ; v1(-9.83,-42.037) -9.495,-41.702 13.365,-41.702
G4/IO_VB3N1_81: D14.2 D24.2 D34.2 D64.2 D74.2 D84.2 U1.81 | length 262.2
  Top Layer w0.152: v1(-34.29,15.95) D14.2@-34.29,14.818 -33.63,14.818 -33.604,14.793 -33.604,10.947 -33.655,10.897 -36.424,10.897 -37.973,9.347 -37.973,-17.894 -33.426,-22.441 -33.426,-27.118 -33.477,-27.169 D64.2@-34.135,-27.169 -34.135,-27.765 -33.426,-28.473 -33.426,-31.509 -30.886,-34.049 -30.886,-45.024 -30.543,-45.367 -3.873,-45.367 -3.544,-45.038 D74.2@-3.544,-41.321 -2.706,-41.321 2.531,-46.558 32.893,-46.558 34.366,-45.085 34.366,-30.956 33.909,-30.499 D84.2@32.056,-30.499 ; v1(-17.479,37.795) -17.161,37.478 D24.2@-17.161,35.2 ; v1(14.321,35.2) D34.2@15.439,35.2
  Bottom Layer w0.152: v1(-34.29,15.95) -31.775,18.466 -23.888,18.466 U1.81@-22.892,19.462 -22.198,20.155 -21.586,20.155 -21.184,20.558 -21.184,24.74 -16.281,29.642 8.763,29.642 v1(14.321,35.2) 11.694,35.2 9.273,37.621 2.923,37.621 1.319,36.017 -20.282,36.017 -20.587,36.322 -20.587,37.91 -20.244,38.252 -17.936,38.252 v1(-17.479,37.795)
G5/IO_VB3N1_82: D15.2 D25.2 D35.2 D65.2 D75.2 D85.2 U1.82 | length 322.6
  Top Layer w0.152: v1(-35.731,-29.845) -35.077,-30.499 D65.2@-34.135,-30.499 ; D15.2@-34.29,18.078 -33.858,18.078 -33.103,17.323 -29.845,17.323 -27.706,19.462 ; v1(-30.416,28.156) -30.416,21.089 -28.789,19.462 -27.706,19.462 ; U1.82@-24.892,19.462 -27.706,19.462 ; v1(-15.646,38.646) -13.901,36.901 D25.2@-13.901,35.2 ; v1(-4.407,38.862) -2.578,40.691 12.188,40.691 17.678,35.2 D35.2@18.699,35.2 18.699,38.227 19.059,38.587 34.793,38.587 35.382,37.998 35.382,-26.835 35.048,-27.169 D85.2@32.056,-27.169 ; D75.2@1.324,-41.321 1.841,-41.321 2.921,-42.4 v1(2.921,-42.926)
  Bottom Layer w0.152: v1(-30.416,28.156) -34.747,32.487 -34.747,38.811 ; v1(-4.407,38.862) -15.646,38.862 v1(-15.646,38.646) v1@-16.015,39.014 ; v1(2.921,-42.926) 1.826,-42.926 1.343,-43.409 -12.068,-43.409 -12.887,-42.589 -15.983,-42.589 -16.248,-42.855 -20.734,-42.855 -27.269,-36.32 -29.256,-36.32 v1(-35.731,-29.845) -39.141,-26.435 -39.141,20.841 -35.941,24.041 -35.941,37.617 -34.747,38.811 ; -34.747,38.811 -34.544,39.014 ; -34.544,39.014 v1@-16.015,39.014 ; -34.544,39.014 -34.519,39.04 -16.04,39.04 v1@-16.015,39.014
G6/IO_VB3N1_83: D16.2 D26.2 D36.2 D66.2 D76.2 D86.2 U1.83 | length 288
  Top Layer w0.152: v1(-31.774,-37.008) D66.2@-31.774,-34.158 -38.81,-34.158 -39.294,-33.674 -39.294,-31.635 -38.659,-31 -38.659,20.866 -38.187,21.338 D16.2@-34.29,21.338 -34.29,23.038 -33.61,23.718 -33.61,25.093 -33.984,25.467 -33.984,25.55 -33.425,26.108 -33.425,26.825 -33.655,27.055 -33.655,27.317 -33.61,27.363 -33.61,28.353 -33.655,28.399 -33.655,39.192 -33.299,39.548 -11.009,39.548 -11.009,39.522 ; U1.83@-22.892,21.462 -23.9,20.454 -27.368,20.454 -27.686,20.771 -27.686,28.294 -30.402,31.01 -31.446,31.01 -32.763,29.693 -32.969,29.693 -33.274,29.997 -33.274,39.065 -32.817,39.522 -11.009,39.522 ; D26.2@-10.641,35.2 v1(-10.641,37.628) -10.641,39.179 -10.984,39.522 -11.009,39.522 ; v1(3.238,-44.666) 5.684,-42.221 D76.2@5.684,-41.321 8.133,-41.321 8.814,-40.64 19.342,-40.64 19.787,-40.195 v1(19.787,-35.179) ; v1(20.578,35.2) D36.2@21.959,35.2 ; D86.2@32.121,-23.801 v1(34.011,-23.801)
  Bottom Layer w0.152: v1(-31.774,-37.008) -28.635,-37.008 -22.158,-43.485 -15.71,-43.485 -15.427,-43.202 -13.387,-43.202 -11.924,-44.666 v1(3.238,-44.666) ; v1(-10.641,37.628) -9.665,36.652 0.605,36.652 2.219,38.267 17.512,38.267 v1(20.578,35.2) ; v1(19.787,-35.179) 26.416,-35.179 34.011,-27.584 v1(34.011,-23.801)
G7/IO_VB3N0_87: D17.2 D27.2 D37.2 D67.2 D77.2 D87.2 U1.87 | length 339.2
  Top Layer w0.152: v1(-36.83,24.598) D17.2@-34.29,24.598 v1(-34.29,26.467) ; v1(-29.361,-37.922) D67.2@-29.361,-36.571 ; D27.2@-7.381,35.2 -6.909,35.2 -6.883,35.225 v1(-6.883,39.727) ; v1(10.044,-43.205) D77.2@10.044,-41.321 ; D37.2@25.219,35.2 v1(25.219,37.516) 25.219,37.592 25.651,38.024 34.392,38.024 35.03,37.386 35.03,-18.082 32.603,-20.509 D87.2@32.056,-20.509
  Bottom Layer w0.152: v1(-36.83,24.598) -36.83,37.236 -34.339,39.727 v1(-6.883,39.727) -3.785,39.727 ; v1(-34.29,26.467) -33.487,25.664 -28.118,25.664 -27.315,26.467 -23.897,26.467 U1.87@-22.892,25.462 ; v1(-29.361,-37.922) -32.158,-37.922 ; v1(10.044,-43.205) 9.458,-43.791 -12.236,-43.791 -13.132,-42.896 -15.676,-42.896 -15.942,-43.161 -21.386,-43.161 -27.921,-36.626 -29.498,-36.626 -30.172,-35.953 -32.31,-35.953 -32.742,-36.386 -32.742,-37.338 -32.158,-37.922 ; v1(25.219,37.516) 23.847,38.887 -2.921,38.887 -3.761,39.727 -3.785,39.727 ; -32.158,-37.922 -32.987,-37.922 -37.411,-33.498 -37.411,-31.838 -39.472,-29.778 -39.472,34.95 -34.671,39.751 -3.785,39.751 -3.785,39.727
G8/IO_VB6N3_166: D18.2 D28.2 D38.2 D68.2 D78.2 D88.2 U1.166 | length 300.2
  Top Layer w0.152: D18.2@-34.29,27.858 -34.29,40.234 -33.786,40.738 -6.413,40.738 -5.461,39.785 -5.461,35.517 -5.143,35.2 D28.2@-4.121,35.2 -3.547,35.2 -1.742,37.004 v1(-1.742,39.776) ; D68.2@-27.075,-38.857 -27.075,-42.115 -25.477,-43.713 -19.939,-43.713 -18.415,-42.189 -18.415,-41.224 -17.755,-40.564 -2.184,-40.564 2.819,-45.568 12.979,-45.568 14.404,-44.143 ; D78.2@14.404,-41.321 14.404,-44.143 ; U1.166@23.108,-12.538 24.105,-11.542 24.105,-4 24.575,-3.531 26.289,-3.531 26.746,-3.988 26.746,-34.288 29.484,-37.026 30.641,-37.026 ; D38.2@28.479,35.2 29.185,35.2 29.21,35.225 ; v1(29.21,37.109) 29.21,35.225 ; 14.404,-44.143 14.404,-45.722 14.859,-46.177 31.496,-46.177 34.011,-43.663 34.011,-37.338 33.699,-37.026 30.641,-37.026 ; 29.21,35.225 30.023,34.413 30.023,34.29 33.96,34.29 34.417,33.833 34.417,-10.465 33.274,-11.608 31.686,-11.608 31.344,-11.951 31.344,-15.01 32.056,-15.723 D88.2@32.056,-17.179 32.056,-18.998 31.344,-19.71 31.344,-36.324 30.641,-37.026
  Bottom Layer w0.152: v1(-1.742,39.776) 26.543,39.776 v1(29.21,37.109)
G9/IO_VB4N3_93: D19.2 D29.2 D39.2 D69.2 D79.2 D89.2 U1.93 | length 326.7
  Top Layer w0.152: D19.2@-32.307,31.317 -30.275,31.317 -27.28,28.321 -27.28,27.849 U1.93@-24.892,25.462 ; v1(-24.916,-42.837) D69.2@-24.916,-41.016 ; D29.2@-0.861,35.2 v1(-0.861,37.948) ; v1(18.465,-43.434) D79.2@18.465,-41.387 ; v1(31.877,36.474) 31.739,36.336 D39.2@31.739,35.2 33.532,35.2 34.723,34.009 34.723,-11.175 32.056,-13.843 D89.2@32.056,-13.849
  Bottom Layer w0.152: v1(-24.916,-42.837) -21.424,-46.33 25.629,-46.33 26.06,-45.898 26.06,-43.84 25.654,-43.434 v1(18.465,-43.434) 19.164,-42.735 29.096,-42.735 29.388,-42.443 29.388,-39.065 36.805,-31.648 36.805,34.569 34.9,36.474 v1(31.877,36.474) 31.369,35.966 21.225,35.966 18.618,38.573 -0.235,38.573 v1(-0.861,37.948) -7.291,37.948 -7.876,38.532 -12.268,38.532 -13.36,37.44 -16.04,37.44 -16.51,37.91 -16.51,38.481 -16.713,38.684 -30.886,38.684 -31.369,38.202 -31.369,33.934 -29.21,31.775 -29.21,27.588 -29.848,26.949 -30.861,26.949 -31.344,27.432 -34.861,27.432 -35.204,27.089 -35.204,25.603 -34.95,25.349 -27.924,25.349 -27.811,25.462 U1.93@-24.892,25.462
GND: H1.0 H2.0 H3.0 H4.0 J2.2 R1.2 R4.1 U1.GND1 U1.GND2 U1.GND3 U1.GND4 | length 262.3
  Top Layer w0.152: U1.GND2@-24.892,-4.538 -26.594,-6.24 -26.594,-24.837 U1.GND1@-24.892,-26.538 -25.933,-27.58 -25.933,-35.179 -24.943,-36.17 10.534,-36.17 11.169,-35.535 11.169,-29.826 ; R1.2@11.169,-28.448 11.169,-29.826 ; U1.GND3@25.108,-4.538 26.391,-5.821 26.391,-25.256 U1.GND4@25.108,-26.538 ; v1(29.434,25.269) 29.434,8.031 J2.2@33.401,4.064 31.841,2.504 H1.0@31.841,-8.54 ; H4.0@31.714,-41.46 30.886,-41.46 30.886,-38.862 25.868,-33.843 25.868,-27.298 U1.GND4@25.108,-26.538 ; 11.169,-29.826 11.188,-29.845 24.701,-29.845 25.108,-29.438 U1.GND4@25.108,-26.538
  Bottom Layer w0.152: H2.0@-34.286,-8.413 -30.411,-4.538 U1.GND2@-24.892,-4.538 ; H3.0@-33.921,-41.206 -28.467,-46.66 26.514,-46.66 H4.0@31.714,-41.46 ; U1.GND3@25.108,-4.538 29.11,-8.54 H1.0@31.841,-8.54 ; v1(29.434,25.269) R4.1@30.677,25.269
IO_VB5N2_137/DAYLIGHT: R3.2 R4.2 U1.137 | length 38.6
  Top Layer w0.152: U1.137@23.108,3.462 24.105,4.458 24.105,5.873 24.701,6.469 26.797,6.469 27.051,6.723 27.051,27.997 29.274,30.22 31.716,30.22 R3.2@32.853,29.083
  Bottom Layer w0.152: R4.2@32.328,25.269 32.328,28.558 R3.2@32.853,29.083
UART_RX/IO_VB7N1_186: J2.3 U1.186 | length 63.7
  Bottom Layer w0.152: U1.186@5.108,-32.538 25.268,-32.538 30.556,-27.25 30.556,-14.998 34.747,-10.807 34.747,5.194 J2.3@33.401,6.54
UART_TX/IO_VB7N0_185: J2.4 U1.185 | length 69.6
  Bottom Layer w0.152: U1.185@5.108,-34.538 18.705,-34.538 18.929,-34.314 23.717,-34.314 24.151,-34.747 26.264,-34.747 31.598,-29.413 31.598,-16.205 35.128,-12.675 35.128,7.29 J2.4@33.401,9.017
WARN/IO_VB6N3_162: D1.1 U1.162 | length 25.4
  Top Layer w0.152: D1.1@15.303,-28.452 15.303,-29.094 15.318,-29.108 20.345,-29.108 21.742,-27.711 21.742,-12.264 21.872,-12.134 21.872,-11.775 U1.162@23.108,-10.538
pads on no net: U1.4 U1.5 U1.6 U1.9 U1.13 U1.18 U1.19 U1.20 U1.21 U1.22 U1.39 U1.43 U1.44 U1.46 U1.50 U1.51 U1.52 U1.56 U1.63 U1.64 U1.65 U1.71 U1.72 U1.73 U1.76 U1.84 U1.85 U1.86 U1.94 U1.95 U1.100 U1.101 U1.102 U1.103 U1.107 U1.108 U1.110 U1.111 U1.112 U1.114 U1.119 U1.120 U1.126 U1.127 U1.128 U1.131 U1.132 U1.133 U1.134 U1.139 U1.142 U1.144 U1.145 U1.146 U1.147 U1.148 U1.159 U1.160 U1.161 U1.164 U1.167 U1.168 U1.169 U1.173 U1.174 U1.175 U1.177 U1.181 U1.182 U1.184 U1.187 U1.188 U1.189 U1.195 U1.198 U1.199 U1.203 U1.216 U1.220 U1.222 U1.223 U1.224 U1.230 U1.233 U1.234 U1.235 U1.236 U1.237 U1.238

## Polygon pours and split planes (outlines as drawn)
GND on Bottom Layer "GND_L02_P004" (solid, remove dead copper, pour order 4): 40.513,47.752 -46.482,47.752 -47.752,46.482 -47.498,46.228 -47.498,-50.038 43.434,-50.038 44.704,-51.308
GND on Top Layer "GND_L01_P002" (solid, remove dead copper, pour order 2): -43.307,42.545 39.37,42.545 41.275,40.64 41.275,-41.783 34.544,-48.514 -46.99,-48.514 -46.99,38.481 -44.069,41.402

## Silkscreen, mask and mechanical layers (free items; w line width, h text height)
Mechanical 1:
  lines w0.254: -41,-40.28 -41,35 -34.598,41.402 32.598,41.402 39,35 39,-41 32.756,-47.244 -34.036,-47.244 -41,-40.28
Mechanical 16:
  lines w0.254: -41.402,-47.498 44.196,-47.498 44.069,41.529
  text "TODO:" at 64.135,32.258 h1.52
  text "Disconnect R27 and connect C16 to Pin 134" at 64.516,28.448 h1.52
  text "89" at 46.228,-4.572 h1.52
  text "86" at -3.937,-50.038 h1.52

## Text inside footprints (layer, text, board x,y; h text height)
J2: Bottom Overlay "VCC" at 26.864,2.478 h1.52 r180; Bottom Overlay "TX" at 28.614,7.228 h1.52 r180; Bottom Overlay "GND" at 27.214,4.728 h1.52 r180; Bottom Overlay "RX" at 28.714,9.728 h1.52 r180
U1: Bottom Overlay "GND" at 26.742,-4.111 h0.75 r180; Bottom Overlay "5V0" at 19.542,-4.111 h0.75 r180; Bottom Overlay "5V0" at -21.118,-4.197 h0.75 r180; Bottom Overlay "GND" at -28.542,-4.197 h0.75 r180; Bottom Overlay "BLAST IT" at 13.57,-33.381 h0.75 r180; Bottom Overlay "GND" at 26.754,-26.213 h0.75 r180; Bottom Overlay "GND" at -28.67,-26.085 h0.75 r180; Bottom Overlay "3V3" at 19.458,-26.213 h0.75 r180; Bottom Overlay "3V3" at -21.246,-26.085 h0.75 r180; Bottom Overlay "Intel FPGA" at -6.334,-1.893 h1.52 r180; Bottom Overlay "SilverLining SW" at -8.958,1.179 h1.52 r180